# Altium PCB LightSwitch.PcbDoc
Units mil, origin at the board's own origin, x right, y up, seen from the top; angles counter-clockwise.
Board outline 2913.39 x 4409.45 mil, 2 copper layers (Top Layer, Bottom Layer); 106 components, 54 nets, 258 pads, 42 vias.
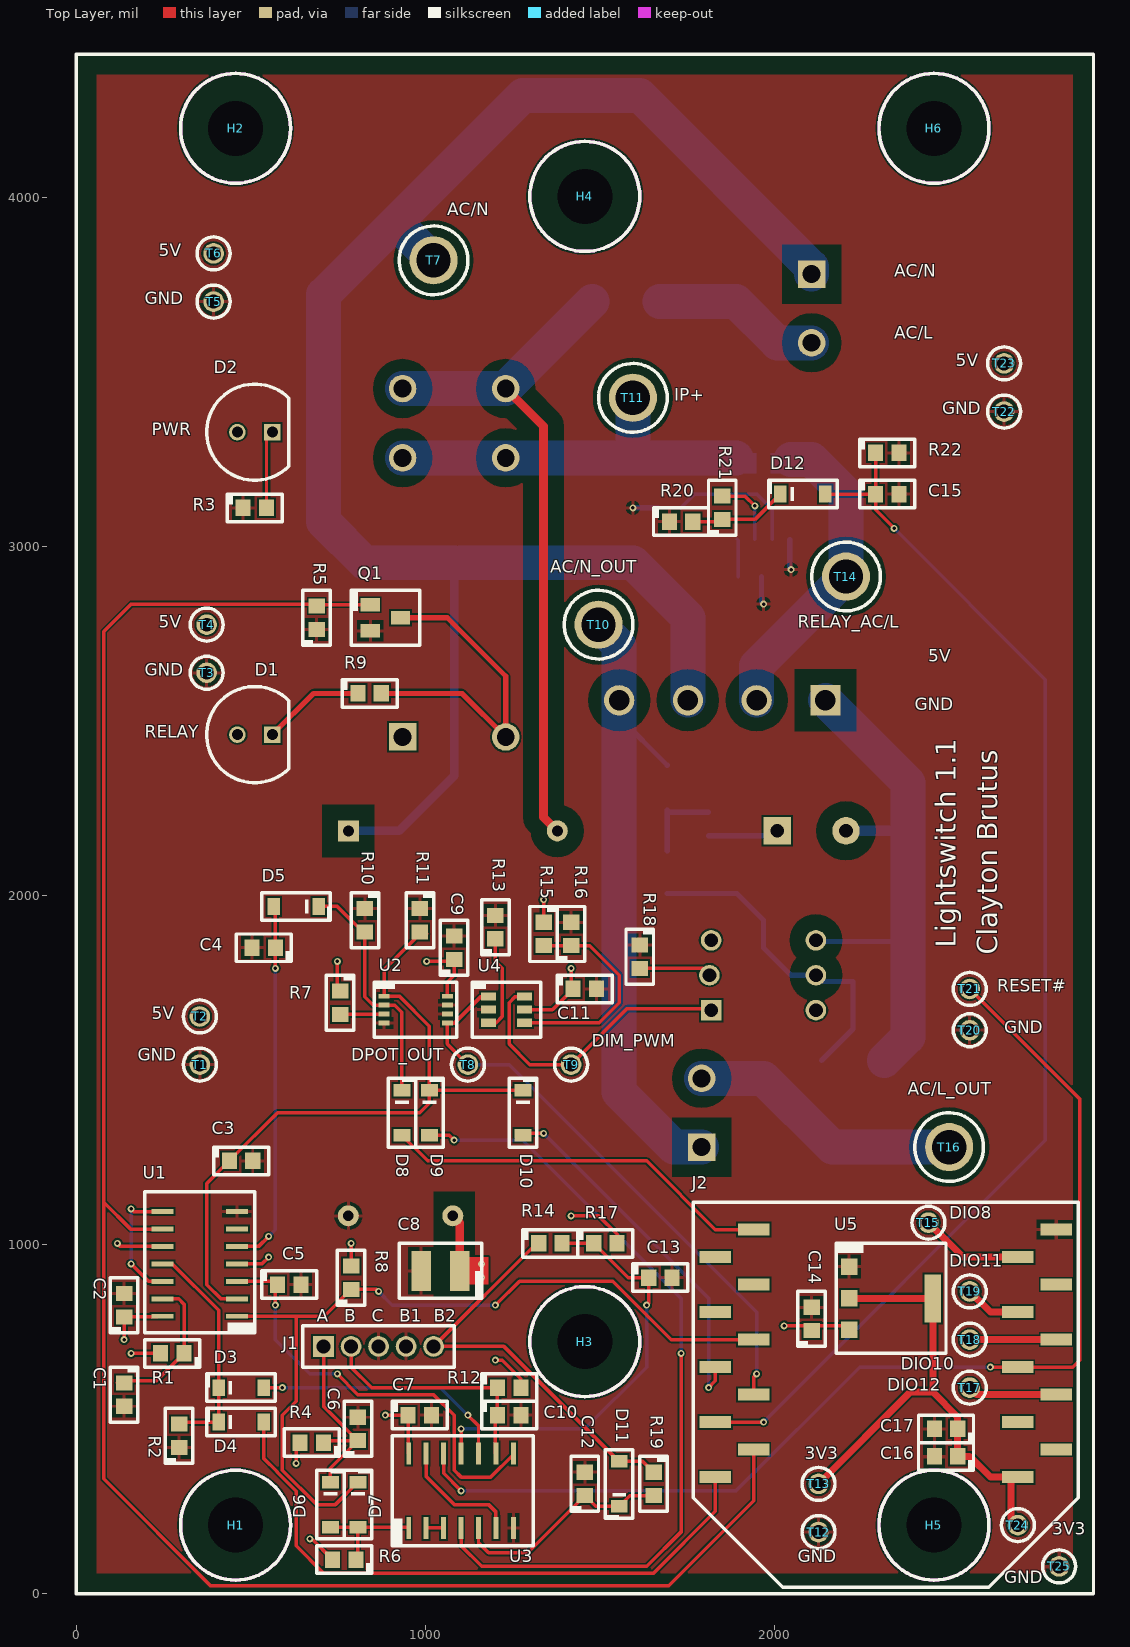
[diagram p0: Top Layer view]
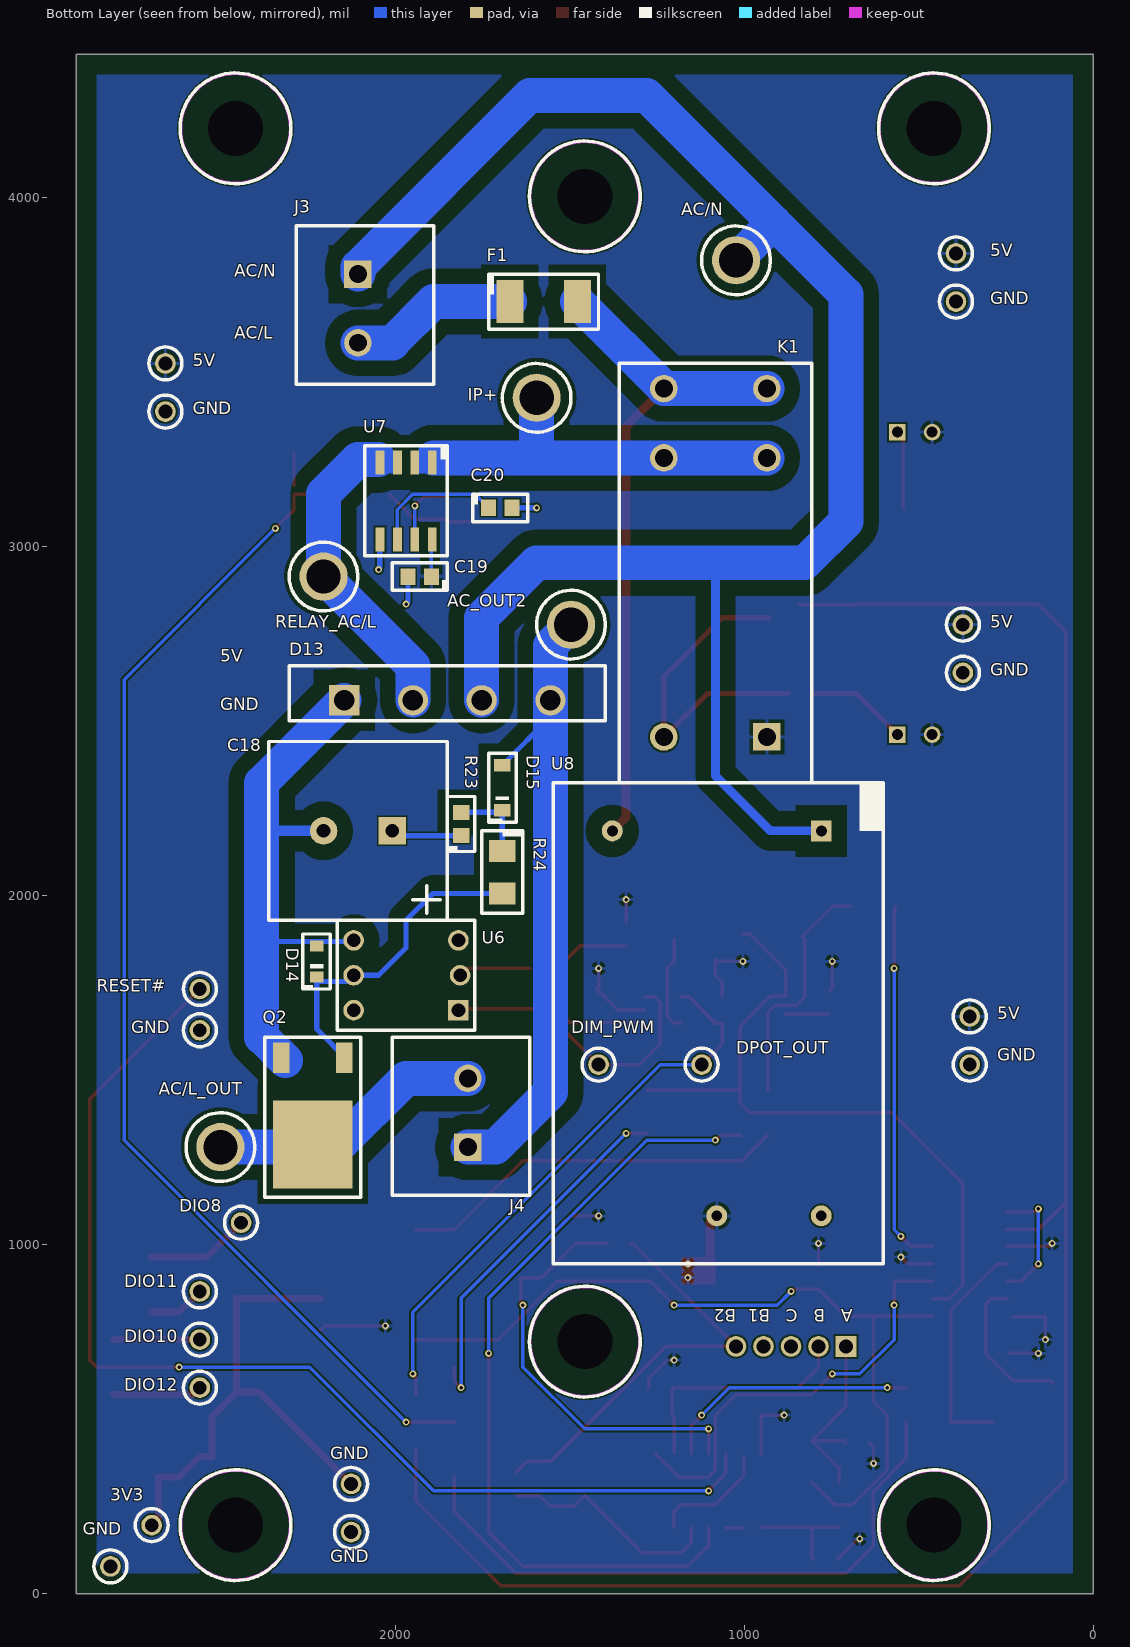
[diagram p1: Bottom Layer view, seen from below]

## Layer stack, top to bottom
Top Solder: solder mask 0.4, Solder Resist, Dk 3.5
Top Layer: signal copper 1.4
Dielectric 1: dielectric 12.6, FR-4, Dk 4.8
Bottom Layer: signal copper 1.4
Bottom Solder: solder mask 0.4, Solder Resist, Dk 3.5

## Board outline
2913.39,0 2913.39,4409.45 0,4409.45 0,0

## Design rules (kind name [scope] priority, off if disabled: settings)
Clearance "Schematic Clearance Constraint_3" [InNet('NetK1_3')] p1: gap=45 ignorepadtopadclearanceinfootprint=TRUE except(0: Arc-Text Arc-Hole Track-Text Track-Hole SMDPad-Text SMDPad-Hole THPad-Text THPad-Hole Via-Text Via-Hole Fill-Text Fill-Hole Poly-Text Poly-Hole Region-Text Region-Hole Text-Text Text-Hole)
Clearance "Schematic Clearance Constraint_2" [InNet('NetD14_1')] p2: gap=45 ignorepadtopadclearanceinfootprint=TRUE except(0: Arc-Text Arc-Hole Track-Text Track-Hole SMDPad-Text SMDPad-Hole THPad-Text THPad-Hole Via-Text Via-Hole Fill-Text Fill-Hole Poly-Text Poly-Hole Region-Text Region-Hole Text-Text Text-Hole)
Clearance "Schematic Clearance Constraint_1" [InNet('NetD15_1')] p3: gap=45 ignorepadtopadclearanceinfootprint=TRUE except(0: Arc-Text Arc-Hole Track-Text Track-Hole SMDPad-Text SMDPad-Hole THPad-Text THPad-Hole Via-Text Via-Hole Fill-Text Fill-Hole Poly-Text Poly-Hole Region-Text Region-Hole Text-Text Text-Hole)
Clearance "Schematic Clearance Constraint_14" [InNet('NetD13_4')] p4: gap=45 ignorepadtopadclearanceinfootprint=TRUE except(0: Arc-Text Arc-Hole Track-Text Track-Hole SMDPad-Text SMDPad-Hole THPad-Text THPad-Hole Via-Text Via-Hole Fill-Text Fill-Hole Poly-Text Poly-Hole Region-Text Region-Hole Text-Text Text-Hole)
Clearance "Schematic Clearance Constraint_13" [InNet('NetJ4_2')] p5: gap=45 ignorepadtopadclearanceinfootprint=TRUE except(0: Arc-Text Arc-Hole Track-Text Track-Hole SMDPad-Text SMDPad-Hole THPad-Text THPad-Hole Via-Text Via-Hole Fill-Text Fill-Hole Poly-Text Poly-Hole Region-Text Region-Hole Text-Text Text-Hole)
Clearance "Schematic Clearance Constraint_12" [InNet('AC/L')] p6: gap=45 ignorepadtopadclearanceinfootprint=TRUE except(0: Arc-Text Arc-Hole Track-Text Track-Hole SMDPad-Text SMDPad-Hole THPad-Text THPad-Hole Via-Text Via-Hole Fill-Text Fill-Hole Poly-Text Poly-Hole Region-Text Region-Hole Text-Text Text-Hole)
Clearance "Schematic Clearance Constraint_11" [InNet('AC/N')] p7: gap=45 ignorepadtopadclearanceinfootprint=TRUE except(0: Arc-Text Arc-Hole Track-Text Track-Hole SMDPad-Text SMDPad-Hole THPad-Text THPad-Hole Via-Text Via-Hole Fill-Text Fill-Hole Poly-Text Poly-Hole Region-Text Region-Hole Text-Text Text-Hole)
Clearance "Schematic Clearance Constraint_9" [InNet('NetC18_2')] p8: gap=45 ignorepadtopadclearanceinfootprint=TRUE except(0: Arc-Text Arc-Hole Track-Text Track-Hole SMDPad-Text SMDPad-Hole THPad-Text THPad-Hole Via-Text Via-Hole Fill-Text Fill-Hole Poly-Text Poly-Hole Region-Text Region-Hole Text-Text Text-Hole)
Clearance "Schematic Clearance Constraint_8" [InNet('NetD13_2')] p9: gap=45 ignorepadtopadclearanceinfootprint=TRUE except(0: Arc-Text Arc-Hole Track-Text Track-Hole SMDPad-Text SMDPad-Hole THPad-Text THPad-Hole Via-Text Via-Hole Fill-Text Fill-Hole Poly-Text Poly-Hole Region-Text Region-Hole Text-Text Text-Hole)
Clearance "Schematic Clearance Constraint" [InNet('NetF1_1')] p10: gap=45 ignorepadtopadclearanceinfootprint=TRUE except(0: Arc-Text Arc-Hole Track-Text Track-Hole SMDPad-Text SMDPad-Hole THPad-Text THPad-Hole Via-Text Via-Hole Fill-Text Fill-Hole Poly-Text Poly-Hole Region-Text Region-Hole Text-Text Text-Hole)
Clearance [All] p11: gap=5 ignorepadtopadclearanceinfootprint=FALSE
HoleSize [All] p1: absolutevalues=TRUE maxlimit=157.48 minlimit=0.98 maxpercent=80.000 minpercent=20.000
PolygonConnect [All] p1: connectstyle=Relief reliefconductorwidth=10 reliefentries=4 polygonreliefangle="90 Angle" airgapwidth=10
RoutingVias [All] p1: holewidth=28 width=50 viastyle="Through Hole" minholewidth=28 minwidth=50 maxholewidth=28 maxwidth=50
SolderMaskExpansion [All] p1: expansion=4
Width "Schematic Width Constraint_1" [InNet('NetK1_3')] p1: maxlimit=250 minlimit=15 preferedwidth=100 minimp=50.000000 maximp=50.000000 favimp=50.000000
Width "Schematic Width Constraint_17" [InNet('AC/L')] p2: maxlimit=250 minlimit=15 preferedwidth=100 minimp=50.000000 maximp=50.000000 favimp=50.000000
Width "Schematic Width Constraint_14" [InNet('AC/N')] p3: maxlimit=250 minlimit=15 preferedwidth=100 minimp=50.000000 maximp=50.000000 favimp=50.000000
Width "Schematic Width Constraint_13" [InNet('NetD15_1')] p4: maxlimit=250 minlimit=15 preferedwidth=100 minimp=50.000000 maximp=50.000000 favimp=50.000000
Width "Schematic Width Constraint_11" [InNet('NetC18_2')] p5: maxlimit=250 minlimit=15 preferedwidth=100 minimp=50.000000 maximp=50.000000 favimp=50.000000
Width "Schematic Width Constraint_10" [InNet('NetD13_4')] p6: maxlimit=250 minlimit=15 preferedwidth=100 minimp=50.000000 maximp=50.000000 favimp=50.000000
Width "Schematic Width Constraint_9" [InNet('NetJ4_2')] p7: maxlimit=250 minlimit=15 preferedwidth=100 minimp=50.000000 maximp=50.000000 favimp=50.000000
Width "Schematic Width Constraint_6" [InNet('NetF1_1')] p8: maxlimit=250 minlimit=15 preferedwidth=100 minimp=50.000000 maximp=50.000000 favimp=50.000000
Width "Schematic Width Constraint" [InNet('NetD14_1')] p9: maxlimit=250 minlimit=15 preferedwidth=100 minimp=50.000000 maximp=50.000000 favimp=50.000000
Width "Schematic Width Constraint_8" [InNet('NetD13_2')] p10: maxlimit=250 minlimit=15 preferedwidth=100 minimp=50.000000 maximp=50.000000 favimp=50.000000
Width [All] p11: maxlimit=98425.2 minlimit=10 preferedwidth=10
29 further rules are at their usual default settings.

## Classes and differential pairs
component class Logic: C1 C2 C3 C4 C5 C6 C7 C10 C13 D3 D4 D5 D6 D7 D8 D9 D10 J1 R1 R2 R4 R6 R8 R10 R11 R12 R14 R17 U1 U3
component class XBee: C12 C17 D11 J2 R19 T15 T17 T18 T19 T20 T21
component class Power: C8 C14 C16 D2 F1 H1 H2 H3 H4 H5 H6 J3 R3 T1 T2 T3 T4 T5 T6 T12 T13 T22 T23 T24 T25 U5 U8
component class Dimmer: C9 C11 C15 C18 C19 C20 D1 D12 D13 D14 D15 J4 K1 Q1 Q2 R5 R7 R9 R13 R15 R16 R18 R20 R21 R22 R23 R24 T7 T8 T9 T10 T11 T14 T16 U2 U4 U6 U7

## Components (designator, comment, footprint, x,y, rotation, side; value= is the part's Value field where it differs from the comment)
C1 "C_CAP_0603" 0603 137.8,570.87 r0 top value=10uF
C2 "C_CAP_0603" 0603 137.8,826.77 r180 top value=.1uF
C3 "C_CAP_0603" 0603 472.44,1240.16 r90 top value=.1uF
C4 "C_CAP_0603" 0603 537.4,1850.39 r270 top value=.1uF
C5 "C_CAP_0603" 0603 610.24,885.83 r90 top value=.1uF
C6 "C_CAP_0603" 0603 807.09,472.44 r180 top value=.1uF
C7 "C_CAP_0603" 0603 984.25,511.81 r90 top value=.1uF
C8 "C_CAP_1210" 1210 1043.31,925.2 r270 top value=100uF
C9 "C_CAP_0603" 0603 1082.68,1850.39 r180 top value=.1uF
C10 "C_CAP_0603" 0603 1240.16,511.81 r90 top value=.1uF
C11 "C_CAP_0603" 0603 1456.69,1732.28 r90 top value=.1uF
C12 "C_CAP_0603" 0603 1456.69,314.96 r180 top value=10uF
C13 "C_CAP_0603" 0603 1673.23,905.51 r90 top value=10uF
C14 "C_CAP_0603" 0603 2106.3,787.4 r180 top value=.1uF
C15 "C_CAP_0603" 0603 2322.83,3149.61 r90 top value=10uF
C16 "C_CAP_0603" 0603 2491.14,393.7 r270 top value=10uF
C17 "C_CAP_0603" 0603 2491.14,472.44 r270 top value=.1uF
C18 "CAP" CAP12.5X20 2106.3,2185.04 r0 bottom value=47uF
C19 "C_CAP_0603" 0603 1929.13,2913.39 r270 bottom value=.1uF
C20 "C_CAP_0603" 0603 1698.82,3110.24 r90 bottom value=1nF
D1 "D_LED_LED5MM" LED5MM 511.81,2460.63 r180 top
D2 "D_LED_LED5MM" LED5MM 511.81,3326.77 r180 top
D3 "D_DIODE_SOD123" SOD123 472.44,590.55 r90 top
D4 "D_DIODE_SOD123" SOD123 472.44,492.13 r90 top
D5 "D_DIODE_SOD123" SOD123 629.92,1968.5 r270 top
D6 "D_DIODE_SOD123" SOD123 728.35,255.91 r0 top
D7 "D_DIODE_SOD123" SOD123 807.09,255.91 r0 top
D8 "D_DIODE_SOD123" SOD123 933.07,1377.95 r0 top
D9 "D_DIODE_SOD123" SOD123 1011.81,1377.95 r0 top
D10 "D_DIODE_SOD123" SOD123 1279.53,1377.95 r0 top
D11 "D_DIODE_SOD123" SOD123 1555.12,314.96 r180 top
D12 "D_ZENER_SOD123" SOD123 2081.3,3149.61 r90 top value=2V
D13 "D_RECTBRIDGE_GBU1506TB" GBU 1850.39,2559.06 r0 bottom
D14 "D_ZENER_SOD323" SOD323 2224.41,1811.02 r0 bottom value=10V
D15 "D_DIODE_SOD123" SOD123 1692.91,2308.47 r0 bottom
F1 "F_FUSE_2410" 2410 1574.8,3700.79 r90 bottom value=15A
H1 "H_MOUNTHOLE_MOUNTHOLE4MM" MOUNTHOLE4MM 456.69,196.85 r0 top locked value=4mm
H2 "H_MOUNTHOLE_MOUNTHOLE4MM" MOUNTHOLE4MM 456.69,4196.85 r0 top locked value=4mm
H3 "H_MOUNTHOLE_MOUNTHOLE4MM" MOUNTHOLE4MM 1456.69,722.44 r0 top locked value=4mm
H4 "H_MOUNTHOLE_MOUNTHOLE4MM" MOUNTHOLE4MM 1456.69,4001.97 r0 top locked value=4mm
H5 "H_MOUNTHOLE_MOUNTHOLE4MM" MOUNTHOLE4MM 2456.69,196.85 r0 top locked value=4mm
H6 "H_MOUNTHOLE_MOUNTHOLE4MM" MOUNTHOLE4MM 2456.69,4196.85 r0 top locked value=4mm
J1 "J_RIBBCONN_RIBBCONN" RIBBCONN 866.14,708.66 r0 top
J2 "J_XBEE_NPPN101BFLC-RC" NPPN101BFLC-RC 2318.7,688.98 r180 top
J3 "J_2POSTERM_1935161" 1935161 2106.3,3681.1 r270 bottom
J4 "J_2POSTERM_1935161" 1935161 1791.34,1377.95 r90 bottom
K1 "K_RELAY-RZ03-1A4_RZ03-1A4-D005" RZ03-1A4-D005 1082.68,2952.76 r270 bottom
Q1 "Q_NFET_SOT23" SOT23 885.83,2795.28 r270 top
Q2 "Q_NFET_TO252" TO252 2235.43,1411.42 r0 bottom
R1 "R_RES_0603" 0603 275.59,688.98 r270 top value=470K
R2 "R_RES_0603" 0603 295.28,452.76 r180 top value=10K
R3 "R_RES_0603" 0603 511.81,3110.24 r90 top value=180
R4 "R_RES_0603" 0603 675.2,433.07 r270 top value=10K
R5 "R_RES_0603" 0603 688.98,2795.28 r180 top value=10K
R6 "R_RES_0603" 0603 767.72,98.43 r270 top value=10K
R7 "R_RES_0603" 0603 755.91,1692.91 r0 top value=806K
R8 "R_RES_0603" 0603 787.4,905.51 r180 top value=10K
R9 "R_RES_0603" 0603 840.55,2578.74 r90 top value=180
R10 "R_RES_0603" 0603 826.77,1929.13 r0 top value=10K
R11 "R_RES_0603" 0603 984.25,1929.13 r0 top value=10K
R12 "R_RES_0603" 0603 1240.16,590.55 r90 top value=10K
R13 "R_RES_0603" 0603 1200.79,1909.45 r180 top value=196K
R14 "R_RES_0603" 0603 1358.27,1003.94 r90 top value=1.62K
R15 "R_RES_0603" 0603 1338.58,1889.76 r0 top value=1M
R16 "R_RES_0603" 0603 1417.32,1889.76 r180 top value=280K
R17 "R_RES_0603" 0603 1515.75,1003.94 r90 top value=10K
R18 "R_RES_0603" 0603 1614.17,1824.8 r0 top value=180
R19 "R_RES_0603" 0603 1653.54,314.96 r0 top value=806K
R20 "R_RES_0603" 0603 1732.28,3070.87 r90 top value=10K
R21 "R_RES_0603" 0603 1850.39,3110.24 r180 top value=2.49K
R22 "R_RES_0603" 0603 2322.83,3267.72 r90 top value=196K
R23 "R_RES_0603" 0603 1811.02,2204.72 r0 bottom value=1.62K
R24 "R_RES_1206" 1206 1692.91,2066.93 r180 bottom value=100K
T1 "TESTPOINT" TESTPOINT1MM 354.33,1515.75 r0 top value=1mm (schematic designator T20)
T2 "TESTPOINT" TESTPOINT1MM 354.33,1653.54 r0 top value=1mm
T3 "TESTPOINT" TESTPOINT1MM 374.02,2637.8 r180 top value=1mm
T4 "TESTPOINT" TESTPOINT1MM 374.02,2775.59 r180 top value=1mm
T5 "TESTPOINT" TESTPOINT1MM 393.7,3700.79 r0 top value=1mm (schematic designator T23)
T6 "TESTPOINT" TESTPOINT1MM 393.7,3838.58 r0 top value=1mm (schematic designator T5)
T7 "TESTPOINT" TESTPOINT2.5MM 1023.62,3818.9 r0 top value=2.54mm
T8 "TESTPOINT" TESTPOINT1MM 1122.05,1515.75 r90 top value=1mm
T9 "TESTPOINT" TESTPOINT1MM 1417.32,1515.75 r0 top value=1mm
T10 "TESTPOINT" TESTPOINT2.5MM 1496.06,2775.59 r0 top value=2.54mm
T11 "TESTPOINT" TESTPOINT2.5MM 1594.49,3425.2 r0 top value=2.54mm (schematic designator T1)
T12 "TESTPOINT" TESTPOINT1MM 2125.98,177.17 r0 top value=1mm (schematic designator T24)
T13 "TESTPOINT" TESTPOINT1MM 2125.98,314.96 r0 top value=1mm (schematic designator T19)
T14 "TESTPOINT" TESTPOINT2.5MM 2204.72,2913.39 r0 top value=2.54mm (schematic designator T11)
T15 "TESTPOINT" TESTPOINT1MM 2440.94,1062.99 r0 top value=1mm (schematic designator T12)
T16 "TESTPOINT" TESTPOINT2.5MM 2500,1279.53 r0 top value=2.54mm (schematic designator T13)
T17 "TESTPOINT" TESTPOINT1MM 2559.06,590.55 r0 top value=1mm (schematic designator T14)
T18 "TESTPOINT" TESTPOINT1MM 2559.06,728.35 r0 top value=1mm (schematic designator T15)
T19 "TESTPOINT" TESTPOINT1MM 2559.06,866.14 r0 top value=1mm (schematic designator T16)
T20 "TESTPOINT" TESTPOINT1MM 2559.06,1614.17 r180 top value=1mm (schematic designator T17)
T21 "TESTPOINT" TESTPOINT1MM 2559.06,1732.28 r180 top value=1mm (schematic designator T18)
T22 "TESTPOINT" TESTPOINT1MM 2657.48,3385.83 r0 top value=1mm (schematic designator T25)
T23 "TESTPOINT" TESTPOINT1MM 2657.48,3523.62 r0 top value=1mm (schematic designator T6)
T24 "TESTPOINT" TESTPOINT1MM 2696.85,196.85 r180 top value=1mm (schematic designator T21)
T25 "TESTPOINT" TESTPOINT1MM 2814.96,78.74 r180 top value=1mm (schematic designator T22)
U1 "U_DUALDFLIP_SOIC14" SOIC14 354.33,944.88 r90 top
U2 "U_DS4301_MSOP8" MSOP8 972.44,1673.23 r270 top value=200K
U3 "U_SN74HCT04DR_SOIC14" SOIC14 1102.36,295.28 r0 top
U4 "U_LTC6992CS6-2_SOT23-6" SOT23-6 1232.68,1673.23 r270 top
U5 "U_LD1117S33TR_SOT223" SOT223 2333.66,846.46 r270 top value=3.3V
U6 "U_MCT275_DIP6" DIP6 1968.5,1771.65 r0 bottom
U7 "U_ACS712_SOIC8" SOIC8 1968.5,3129.92 r0 bottom
U8 "U_IRM-02-5_IRM-02-5" IRM-02-5 779.53,2185.04 r270 bottom value=5V

## Footprints (in the part's own frame and the unit in brackets; to place one, negate y for a bottom-side part, rotate by r counter-clockwise, add the part's x,y. Pads: shape width x height; smd on the part's side, far side on the other; paste and mask are expansions set on the pad)
0603 [mm]
  rect 1.2x1.1 smd: 1(0,0.85) 2(0,-0.85)
  silkscreen extent -1,-2 1,2, body extent -0.43,-0.77 0.43,0.78, height 0.44
1206 [mm]
  rect 1.9x1.6 smd: 1(0,1.55) 2(0,-1.55)
  silkscreen extent -1.5,-3 1.5,3, body extent -0.8,-1.6 0.8,1.6, height 1.5
1210 [mm]
  rect 2.9x1.4 smd: 1(0,1.4) 2(0,-1.4)
  silkscreen extent -2,-3 2,3, body extent -1.35,-1.75 1.35,1.75, height 2.7
2410 [mm]
  rect 3.15x1.96 smd: 1(0,2.455) 2(0,-2.455)
  silkscreen extent -2,-4 2,4, body extent -1.27,-3.05 1.27,3.05, height 2.58
1935161 [mm]
  rect 2x2 hole 1.3: 1(-2.5,0)
  round 2 hole 1.3: 2(2.5,0)
  silkscreen extent -6,-4.5 5.5,5.5, body extent -5.59,-4 4.98,5, height 11.4
CAP12.5X20 [mm]
  rect 2x2 hole 1: 1(-2.5,0)
  round 2 hole 1: 2(2.5,0)
  silkscreen extent -6.5,-6.5 6.5,6.5, body extent -6.24,-6.25 6.24,6.25, height 20.33
DIP6 [mm]
  rect 1.5x1.5 hole 1: 1(-3.81,2.54)
  round 1.5 hole 1: 2(-3.935,0) 3(-3.81,-2.54) 4(3.81,-2.54) 5(3.81,0) 6(3.81,2.54)
  silkscreen extent -5,-4 5,4, body extent -3.94,-3.63 3.94,3.63, height 4.4
GBU [mm]
  rect 2.2x2.2 hole 1.5: 1(7.5,0)
  round 2.2 hole 1.5: 2(2.5,0) 3(-2.5,0) 4(-7.5,0)
  silkscreen extent -11.5,-2.5 11.5,1.5, body extent -11.02,-2.22 11.03,1.21, height 21.27
IRM-02-5 [mil] "IRM-02-5"
  rect 60x60 hole 31.5: 1(0,0)
  round 60 hole 31.5: 2(0,-598.43)
  round 60 hole 30: 3(1102.36,0) 4(1102.36,-299.21)
  silkscreen extent -138,-768 1240,177, body extent -112,-736 1215,138, height 591
LED5MM [mm]
  rect 1.2x1.2 hole 0.8: 1(-1.27,0)
  round 1.2 hole 0.8: 2(1.27,0)
  silkscreen extent -2.47,-3.5 3.5,3.5, body extent -2.58,-2.95 2.87,2.95, height 13.6
MOUNTHOLE4MM [mm]
  round 0 hole 4 unplated: ""(0,0)
  Keep-Out Layer circle w0.254: c0,0 r4
  silkscreen extent -4,-4 4,4
MSOP8 [mm]
  rect 0.35x0.8 smd mask+0.051: 1(-0.975,-2.3) 2(-0.325,-2.3) 3(0.325,-2.3) 4(0.975,-2.3) 5(0.975,2.3) 6(0.325,2.3) 7(-0.325,2.3) 8(-0.975,2.3)
  silkscreen extent -2,-3 2,3, body extent -1.5,-2.45 1.5,2.45, height 1.15
NPPN101BFLC-RC [mm]
  rect 2.29x0.89 smd: 1(-9.605,9) 2(-12.395,7) 3(-9.605,5) 4(-12.395,3) 5(-9.605,1) 6(-12.395,-1) 7(-9.605,-3) 8(-12.395,-5) 9(-9.605,-7) 10(-12.395,-9) 11(9.605,-9) 12(12.395,-7) 13(9.605,-5) 14(12.395,-3) 15(9.605,-1) 16(12.395,1) 17(9.605,3) 18(12.395,5) 19(9.605,7) 20(12.395,9)
  silkscreen extent -14,-11 14,17, body extent -13,-10.25 13,10.25
RIBBCONN [mm]
  rect 1.5x1.5 hole 1: 1(-4,0)
  round 1.5 hole 1: 2(-2,0) 3(0,0) 4(2,0) 5(4,0)
  silkscreen extent -5.5,-1.5 5.5,1.5
RZ03-1A4-D005 [mm]
  rect 2x2 hole 1.3: 1(12.67,3.75)
  round 2 hole 1.3: 2(12.67,-3.75) 3(-7.63,3.75) 4(-7.63,-3.75) 5(-12.67,-3.75) 6(-12.67,3.75)
  silkscreen extent -14.5,-7 16,7, body extent -13.82,-6.35 15.18,6.35, height 15.7
SOD123 [mm]
  rect 1.22x0.91 smd: 1(0,1.635) 2(0,-1.635)
  silkscreen extent -1,-2.5 1,2.5, body extent -0.85,-1.92 0.85,1.93, height 1.35
SOD323 [mm]
  rect 1x0.8 smd: 1(0,1.115) 2(0,-1.115)
  silkscreen extent -1,-2 1,2, body extent -0.72,-1.35 0.72,1.35
SOIC8 [mm]
  rect 0.65x1.75 smd: 1(-1.905,-2.8) 2(-0.635,-2.8) 3(0.635,-2.8) 4(1.905,-2.8) 5(1.905,2.8) 6(0.635,2.8) 7(-0.635,2.8) 8(-1.905,2.8)
  silkscreen extent -3,-4 3,4, body extent -2.5,-3.1 2.5,3.1, height 1.95
SOIC14 [mm]
  rect 0.35x1.6 smd: 1(-3.81,-2.7) 2(-2.54,-2.7) 3(-1.27,-2.7) 4(0,-2.7) 5(1.27,-2.7) 6(2.54,-2.7) 7(3.81,-2.7) 8(3.81,2.7) 9(2.54,2.7) 10(1.27,2.7) 11(0,2.7) 12(-1.27,2.7) 13(-2.54,2.7) 14(-3.81,2.7)
  silkscreen extent -5,-4 5.25,4, body extent -4.32,-3.02 4.32,3.02, height 1.59
SOT23 [mm]
  rect 1x1.4 smd: 1(-0.95,-1.1) 2(0.95,-1.1) 3(0,1.1)
  silkscreen extent -2,-2.5 2,2.5, body extent -1.5,-1.2 1.5,1.2, height 1.1
SOT23-6 [mm]
  rect 0.6x1.1 smd: 1(-0.95,-1.31) 2(0,-1.31) 3(0.95,-1.31) 4(0.95,1.31) 5(0,1.31) 6(-0.95,1.31)
  silkscreen extent -2,-2.5 2,2.5, body extent -1.5,-1.42 1.5,1.42
SOT223 [mm]
  rect 1.2x1.2 smd: 1(-2.3,-3.05) 2(0,-3.05) 3(2.3,-3.05)
  rect 3.5x1.2 smd: 4(0,3.05)
  silkscreen extent -4,-4 4,4, body extent -3.25,-3.45 3.25,3.45
TESTPOINT1MM [mm]
  round 1.5 hole 1: 1(0,0)
  silkscreen extent -1.2,-1.2 1.2,1.2
TESTPOINT2.5MM [mm]
  round 3.5 hole 2.5: 1(0,0)
  silkscreen extent -2.5,-2.5 2.5,2.5
TO252 [mm]
  rect 1.2x2.2 smd: 1(-2.28,-3.15) 3(2.28,-3.15)
  rect 5.8x6.4 smd: 2(0,3.15)
  silkscreen extent -3.5,-4.65 3.5,7, body extent -3.25,-3.5 3.25,5.2, height 2.3

## Part data
C1 C12 C13 C15 C16: Manufacturer="Taiyo Yuden", PartNumber=JMK107ABJ106MA-T, Rating=6.3V
C2 C3 C4 C5 C6 C7 C9 C10 C11 C14 C17 C19: Manufacturer=KEMET, PartNumber=C0603C104K5RACAUTO, Rating=50V
C8: Manufacturer=Murata, PartNumber=GRM32ER61A107ME20L, Rating=10V
C18: library part C_CAP-P_CAP12.5X20, Manufacturer=Nichicon, PartNumber=UVR2D470MHD1TO, Rating=200V
C20: Manufacturer="AVX Corporation", PartNumber=06035C102KAT2A, Rating=50V
D3 D4 D5 D6 D7 D8 D9 D10 D11 D15: Manufacturer="Nexperia USA Inc", PartNumber=BAS16GWJ, Rating=215mA
D12: Manufacturer="Diodes Incorporated", PartNumber=BZT52C2V0-7-F, Rating=500mW
D13: Manufacturer="SMC Diode Solutions", PartNumber=GBU1506TB, Rating=15A
D14: Manufacturer="On Semiconductor", PartNumber=MM3Z10VT1G, Rating=300mW
F1: Manufacturer="Bel Fuse", PartNumber=0679H9150-05, Rating=350VAC
J2: Manufacturer="Sullins Connector Solutions", PartNumber=NPPN101BFLC-RC, Rating=1A
J3 J4: Manufacturer="Phoenix Contact", PartNumber=1935161, Rating=17.5A
K1: Manufacturer="TE Connectivity / Potter and Brumfield", PartNumber=RZ03-1A4-D005, Rating=16A
Q1: Manufacturer="On Semiconductor", PartNumber=BSS138, Rating=220mA
Q2: Manufacturer="Infineon Technologies", PartNumber=IPD50R280CEAUMA1, Rating=18.1A
R1: Manufacturer=Yageo, PartNumber=RC0603JR-07470KL, Rating=1/10W
R2 R4 R5 R6 R8 R10 R11 R12 R17 R20: Manufacturer=Yageo, PartNumber=RC0603JR-0710KL, Rating=1/10W
R3 R9 R18: Manufacturer=Yageo, PartNumber=RC0603JR-07180RL, Rating=1/10W
R7 R19: Manufacturer=Yageo, PartNumber=RC0603FR-07806KL, Rating=1/10W
R13 R22: Manufacturer=Yageo, PartNumber=RC0603FR-07196KL, Rating=1/10W
R14 R23: Manufacturer=Yageo, PartNumber=RC0603FR-071K62L, Rating=1/10W
R15: Manufacturer=Yageo, PartNumber=RC0603FR-071ML, Rating=1/10W
R16: Manufacturer=Yageo, PartNumber=RC0603FR-07280KL, Rating=1/10W
R21: Manufacturer=Yageo, PartNumber=RC0603FR-072K49L, Rating=1/10W
R24: Manufacturer=Yageo, PartNumber=RC1206JR-07100KL, Rating=1/4W
T1 T2 T3 T4 T5 T6 T8 T9 T12 T13 T15 T17 T18 T19 T20 T21 T22 T23 T24 T25: library part T_TESTPOINT_TESTPOINT1MM
T7 T10 T11 T14 T16: library part T_TESTPOINT_TESTPOINT2.5MM
U1: Manufacturer=TI, PartNumber=SN74HCT74DR
U2: Manufacturer=Maxim, PartNumber=DS4301
U3: Manufacturer=TI, PartNumber=SN74HCT04DR
U4: Manufacturer=Linear, PartNumber=LTC6992CS6-2
U5: Manufacturer=STM, PartNumber=LD1117S33TR, Rating=800mA
U6: Manufacturer=Vishay, PartNumber=MCT275
U7: Manufacturer="Allegro MicroSystems, LLC", PartNumber=ACS712ELCTR-20A-T, Rating=20A
U8: PartNumber=IRM-02-5, Rating=400mA

## Via types
v1: diameter 20, hole 10, Top Layer to Bottom Layer, 32 vias
v2: diameter 20, hole 10, Top Layer to Bottom Layer, tented both sides, 10 vias

## Nets (pads, with @x,y where several pads share a name; then routed paths per layer and width w, separated by ;. In a path a pad name is that pad's centre, name@x,y a point inside that pad or via, vN(x,y) a via of type N, cw(c..) or ccw(c..) an arc to the next point about the centre after c; other vN are vias at no path point)
3V3: C16.1 C17.1 J2.1 T13.1 T24.1 U5.2 U5.4 | length 1504.2
  Top Layer w20: T13.1 2388.78,577.76 2453.74,577.76 ; 2263.78,846.46 U5.2 U5.4 2453.74,577.76 ; T24.1@2677.17,216.54 2677.17,334.65 2618.11,334.65 2559.05,393.7 C16.1 C17.1 2524.61,506.89 2453.74,577.76
5V: C2.1 C7.1 C8.1 C9.1 C11.1 C14.1 C19.1 D1.2 D2.2 K1.1 R1.2 R4.2 R6.2 R7.1 R8.2 R12.2 R15.1 R17.2 T2.1 T4.1 T6.1 T23.1 U1.4 U1.10 U1.14 U2.8 U3.14 U4.5 U5.3 U7.8 U8.4 | length 2204.8
  Top Layer w10: v1(118.11,1003.94) 127.17,994.88 U1.10 ; v1(137.8,728.35) C2.1 U1.14@230.31,793.31 ; v1(157.48,688.98) R1.2 ; U1.4 531.5,944.88 v1(551.18,964.57) ; v1(629.92,374.02) 629.92,421.26 R4.2 ; v1(669.29,157.48) 675.2,157.48 R6.2 ; v2(748.03,1811.02) 748.03,1734.25 R7.1 ; R8.2 v1(787.4,1003.94) ; v1(885.83,511.81) C7.1 950.79,403.15 U3.14 ; v2(1003.94,1811.02) 1076.77,1811.02 C9.1 1082.68,1771.65 1062.99,1751.97 U2.8 ; v1(1200.79,669.29) 1220.47,669.29 1273.62,616.14 R12.2 ; U4.5 1364.17,1673.23 C11.1 1417.32,1738.19 v2(1417.32,1791.34) ; R15.1 v2(1338.58,1988.19) ; v1(1417.32,1082.68) 1496.06,1082.68 1549.21,1029.53 R17.2 ; v2(2027.56,767.72) 2201.77,767.72 U5.3
  Top Layer w25: U8.4 1098.43,1062.99 C8.1
  Bottom Layer w10: U7.8 1895.67,3017.52 C19.1
  other v2: 1161.42,905.51 1161.42,944.88
AC/L: F1.2 K1.5 K1.6 U8.2 | length 1974.8
  Top Layer w25: K1.5 1338.58,3343.31 1338.58,2224.41 U8.2
  Bottom Layer w100: K1.6 K1.5 1230.31,3452.95 F1.2
AC/N: D13.3 J3.1 T7.1 U8.1 | length 5040.8
  Top Layer w25: D13.3@1732.28,2578.74 D13.3
  Bottom Layer w25: U8.1 925.2,2185.04 1082.68,2342.52 1082.68,2952.76
  Bottom Layer w100: T7.1 915.35,3927.17 ; 1082.68,2952.76 826.77,2952.76 708.66,3070.87 708.66,3720.47 915.35,3927.17 ; 1102.36,2952.76 1594.49,2952.76 1751.97,2795.27 D13.3 ; J3.1 2106.3,3799.21 1614.17,4291.34 1279.53,4291.34 915.35,3927.17
BUT_RELAY_CTRL: D3.2 U3.10 | length 740.6
  Top Layer w10: D3.2 v1(590.55,590.55) ; v1(1122.05,511.81) 1152.36,481.5 U3.10
  Bottom Layer w10: v1(590.55,590.55) 1043.31,590.55 v1(1122.05,511.81)
CURRENT_SENSE: C15.1 D12.2 J2.18 R22.1 | length 3567.2
  Top Layer w10: J2.18 v1(1968.5,492.13) ; D12.2 C15.1 2289.37,3104.33 v1(2342.52,3051.18) ; 2289.37,3175.2 R22.1
  Bottom Layer w10: v1(1968.5,492.13) 2775.59,1299.21 2775.59,2618.11 v1(2342.52,3051.18)
DIM_PWM: T9.1 U4.6 U6.1 | length 840.8
  Top Layer w10: U4.6 1257.87,1710.63 1240.16,1692.91 1240.16,1574.8 1299.21,1515.75 T9.1 1577.95,1676.38 1813.78,1676.38 U6.1
DPOT_INC#: C3.1 D9.1 D10.1 R11.2 U1.2 U2.1 | length 2020
  Top Layer w10: U1.2 414.96,844.88 374.02,885.83 374.02,1175.2 C3.1 576.77,1377.95 984.25,1377.95 1011.81,1405.51 D9.1 ; R11.2@1003.94,1889.76 984.25,1889.76 881.89,1787.4 U2.1 926.18,1711.61 1011.81,1625.99 D9.1 ; D10.1 D9.1
DPOT_OUT: J2.17 T8.1 U2.5 U4.1 | length 1653
  Top Layer w10: T8.1 1062.99,1574.8 U2.5 1083.66,1634.84 1159.45,1710.63 U4.1 ; J2.17 1940.55,621.65 v2(1948.82,629.92)
  Bottom Layer w10: T8.1 1240.16,1515.75 1948.82,807.09 v2(1948.82,629.92)
DPOT_U/D#: D5.1 D8.1 R10.2 U2.2 | length 698.2
  Top Layer w10: D5.1 748.03,1968.5 833.66,1882.87 826.77,1875.98 826.77,1710.45 851.2,1686.02 912.58,1686.02 933.07,1665.54 D8.1
ENC_A: C6.1 D6.1 J1.1 R4.1 | length 562.6
  Top Layer w10: R4.1 714.57,438.98 C6.1 ; J1.1 708.66,537.4 C6.1 ; D6.1 728.35,360.24 C6.1
ENC_B: C10.1 J1.2 R12.1 U3.9 | length 692.7
  Top Layer w10: J1.2 787.4,649.61 846.46,590.55 R12.1 C10.1 1200.79,505.91 U3.9@1200.79,403.15
ENC_BUT2: D11.2 J1.5 R14.1 R19.1 | length 1202.6
  Top Layer w10: R14.1 1318.9,1003.94 J1.5 1225.37,708.66 1554.7,379.33 D11.2 1622.64,379.33 R19.1
ENC_U/D#: C4.1 D5.2 U1.5 | length 1057.7
  Top Layer w10: U1.5 522.44,994.88 v1(551.18,1023.62) ; D5.2 570.87,1963.19 C4.1 v1(570.87,1791.34)
  Bottom Layer w10: v1(551.18,1023.62) 570.87,1043.31 v1(570.87,1791.34)
GND: C1.2 C2.2 C3.2 C4.2 C5.2 C6.2 C7.2 C8.2 C9.2 C10.2 C11.2 C12.2 C13.2 C14.2 C15.2 C16.2 C17.2 C19.2 C20.2 J1.3 J1.4 J2.10 Q1.2 R2.1 R3.1 R5.1 R10.1 R11.1 R13.2 R16.2 R18.1 R20.1 R22.2 T1.1 T3.1 T5.1 T12.1 T20.1 T22.1 T25.1 U1.7 U2.4 U2.6 U2.7 U3.7 U4.2 U5.1 U7.5 U8.3 | length 240.2
  Bottom Layer w15: v1(1594.49,3110.24) C20.2 ; C19.2 1962.6,2840.55 v1(1968.5,2834.65) ; U7.5 2043.5,2936.81 v1(2047.24,2933.07)
HOLD_RESET: C12.1 D11.1 R19.2 U3.5 | length 648.5
  Top Layer w10: U3.5 1152.36,146.85 1181.1,118.11 1293.31,118.11 C12.1 1487.6,250.59 D11.1 1586.02,281.5 R19.2
NetC1_1: C1.1 R1.1 U1.13 | length 433.9
  Top Layer w10: C1.1@118.11,604.33 124.02,610.24 230.31,610.24 R1.1 309.06,829.53 293.7,844.88 U1.13
NetC5_1: C5.1 U1.3 U3.8 | length 1241.2
  Top Layer w10: U1.3 567.72,894.88 570.87,891.73 v1(570.87,826.77) ; v1(748.03,629.92) 807.09,570.87 1023.62,570.87 1082.68,511.81 1082.68,481.04 1082.36,480.73 1082.36,464.16 1082.68,463.84 1082.68,354.33 1102.36,334.65 1187.96,334.65 1252.36,399.05 U3.8
  Bottom Layer w10: v1(570.87,826.77) 570.87,728.35 669.29,629.92 v1(748.03,629.92)
NetC13_1: C13.1 R14.2 R17.1 U3.11 | length 1222.9
  Top Layer w10: U3.11 v1(1102.36,472.44) ; R14.2 R17.1 1580.71,905.51 C13.1 1639.76,832.68 v1(1633.86,826.77)
  Bottom Layer w10: v1(1102.36,472.44) 1456.69,472.44 1633.86,649.61 v1(1633.86,826.77)
NetC18_1: C18.1 R23.1 | length 202.6
  Bottom Layer w15: R23.1 1994.09,2171.26 C18.1
NetC18_2: C18.2 D13.1 D14.2 Q2.3 U6.4 | length 1600.2
  Bottom Layer w15: U6.4 2122.05,1868.11 2379.92,1868.11 2381.89,1870.08
  Bottom Layer w30: C18.2 2381.89,2185.04
  Bottom Layer w100: D13.1 2381.89,2322.84 2381.89,2185.04 2381.89,1870.08 2381.89,1595.27 Q2.3@2314.17,1527.56
NetC20_1: C20.1 U7.6 | length 381.3
  Bottom Layer w10: C20.1 1771.65,3149.61 1948.82,3149.61 1993.5,3104.92 U7.6
NetD1_1: D1.1 R9.1 | length 294.2
  Top Layer w15: D1.1 679.92,2578.74 R9.1
NetD2_1: D2.1 R3.2 | length 216.5
  Top Layer w10: R3.2 D2.1@545.28,3326.77
NetD3_1: D3.1 D4.1 R2.2 U1.11 | length 653.9
  Top Layer w10: U1.11 275.59,944.88 408.07,812.4 D3.1 D4.1 R2.2@289.37,492.13
NetD6_2: D6.2 D7.2 R6.1 U3.1 | length 320.6
  Top Layer w10: D6.2 D7.2 ; R6.1 807.09,104.33 D7.2 ; U3.1 949.8,191.54 D7.2
NetD9_2: D9.2 U3.4 | length 2329.6
  Top Layer w10: D9.2 1068.31,1313.58 v1(1082.68,1299.21) ; U3.4 1102.36,137.8 1161.42,78.74 1633.86,78.74 1732.28,177.17 v1(1732.28,688.98)
  Bottom Layer w10: v1(1082.68,1299.21) 1279.53,1299.21 1732.28,846.46 v1(1732.28,688.98)
NetD12_1: D12.1 R20.2 R21.1 | length 283.8
  Top Layer w10: R20.2 1844.49,3070.87 R21.1 1944.09,3076.77 D12.1
NetD13_2: D13.2 T14.1 U7.3 U7.4 | length 894.8
  Bottom Layer w100: D13.2 1948.82,2657.48 T14.1 2204.72,3149.61 2106.3,3248.03 U7.4@2047.24,3248.03
NetD13_4: D13.4 D15.2 J4.1 T10.1 | length 1907.8
  Bottom Layer w15: D13.4 1555.12,2510.63 D15.2
  Bottom Layer w100: T10.1 1555.12,2716.54 D13.4 1555.12,1437.01 1712.6,1279.53 J4.1
NetD14_1: D14.1 Q2.1 R24.2 U6.5 | length 957.8
  Bottom Layer w15: R24.2 1891.73,2005.91 1968.5,1929.13 1968.5,1850.39 2047.24,1771.65 U6.5 ; U6.5@2106.3,1771.65 U6.5 ; Q2.1@2134.65,1527.56 2224.41,1617.32 2224.41,1753.94 2136.22,1753.94 U6.5
NetD15_1: D15.1 R23.2 R24.1 | length 228.3
  Bottom Layer w15: R24.1 D15.1 ; D15.1@1698.82,2238.19 R23.2
NetF1_1: F1.1 J3.2 | length 483.8
  Bottom Layer w100: F1.1 1889.76,3700.79 2007.87,3582.68 J3.2
NetJ2_4: J2.4 T17.1 | length 255.8
  Top Layer w20: T17.1 2578.74,570.87 J2.4
NetJ2_6: J2.6 T18.1 | length 247.6
  Top Layer w20: T18.1 J2.6
NetJ2_7: J2.7 T19.1 | length 162.3
  Top Layer w20: T19.1 2618.11,807.09 J2.7
NetJ2_9: J2.9 T15.1 | length 296.7
  Top Layer w20: T15.1 2539.37,964.57 J2.9
NetJ4_2: J4.2 Q2.2 T16.1 | length 790.2
  Bottom Layer w100: J4.2 1968.5,1476.38 2165.35,1279.53 T16.1
NetK1_2: K1.2 Q1.3 R9.2 | length 952.5
  Top Layer w15: R9.2 1105.51,2578.74 K1.2 1230.31,2627.95 1062.99,2795.28 Q1.3
NetK1_3: K1.3 K1.4 T11.1 U7.1 U7.2 | length 1126.8
  Bottom Layer w100: K1.3 K1.4 1594.49,3253.15 ; T11.1 1594.49,3253.15 ; U7.1@1889.76,3253.15 1594.49,3253.15
NetR7_2: R7.2 U2.3 | length 126.4
  Top Layer w10: R7.2 880.91,1659.45 U2.3
NetR13_1: R13.1 U4.3 | length 277.3
  Top Layer w10: U4.3 1202.76,1635.83 1220.47,1653.54 1220.47,1791.34 1200.79,1811.02 R13.1
NetR15_2: R15.2 R16.1 U4.4 | length 624.8
  Top Layer w10: U4.4 1498.03,1635.83 1555.12,1692.91 1555.12,1771.65 1470.47,1856.3 R16.1 R15.2
NetR18_2: R18.2 U6.2 | length 207.6
  Top Layer w10: R18.2 1793.9,1791.34 U6.2
NetR21_2: R21.2 U7.7 | length 200.6
  Top Layer w10: R21.2 1915.35,3143.7 v1(1943.5,3115.55)
  Bottom Layer w10: U7.7 v1(1943.5,3115.55)
NetU1_8: U1.8 U1.12 | length 362.4
  Top Layer w10: v1(157.48,944.88) 207.48,894.88 U1.12 ; v1(157.48,1102.36) 164.96,1094.88 U1.8
  Bottom Layer w10: v1(157.48,944.88) v1(157.48,1102.36)
NetU3_2: U3.2 U3.3 | length 50
  Top Layer w10: U3.2 U3.3
NetU3_6: U3.6 U3.13 | length 343.5
  Top Layer w10: U3.13@1002.05,391.82 1002.05,336.53 1082.68,255.91 1181.1,255.91 1202.36,234.65 U3.6
RELAY_CTRL: J2.19 Q1.1 R5.2 U1.9 | length 5663.6
  Top Layer w10: U1.9 155.91,1044.88 78.74,1122.05 ; Q1.1 692.91,2832.68 R5.2 683.07,2834.65 157.48,2834.65 78.74,2755.91 78.74,1122.05 ; J2.19 1940.55,267.32 1696.76,23.54 384.9,23.54 78.74,329.7 78.74,1122.05
XB_CTRL#: D7.1 J2.15 R8.1 U1.1 | length 2369.4
  Top Layer w10: U1.1 629.92,794.88 ; D7.1 742.72,255.91 688.98,255.91 590.55,354.33 590.55,511.81 629.92,551.18 629.92,794.88 ; v1(866.14,866.14) 860.24,872.05 R8.1 710.24,794.88 629.92,794.88 ; v1(1200.79,826.77) 1269.77,895.76 1536.59,895.76 1704,728.35 J2.15
  Bottom Layer w10: v1(866.14,866.14) 905.51,826.77 v1(1200.79,826.77)
XB_INC#: D10.2 J2.16 | length 1050.3
  Top Layer w10: D10.2@1279.53,1318.9 v2(1338.58,1318.9) ; v2(1811.02,590.55) 1830.71,610.24 J2.16
  Bottom Layer w10: v2(1338.58,1318.9) 1811.02,846.46 v2(1811.02,590.55)
XB_RELAY_TOGGLE: D4.2 J2.20 | length 1798.2
  Top Layer w10: D4.2 536.81,388.39 575.55,349.65 575.55,348.12 630.01,293.66 630.01,166.37 629.92,166.28 629.92,137.8 708.66,59.06 1653.54,59.06 1830.71,236.22 J2.20
XB_RESET#: J2.5 T21.1 U3.12 | length 3247
  Top Layer w10: U3.12 1052.36,345.28 v1(1102.36,295.28) ; T21.1 2874.02,1417.32 2874.02,669.29 2854.33,649.61 J2.5 v1(2618.11,649.61)
  Bottom Layer w10: v1(1102.36,295.28) 1889.76,295.28 2244.09,649.61 v1(2618.11,649.61)
XB_U/D#: D8.2 J2.11 | length 1119.4
  Top Layer w10: D8.2 1006.49,1240.16 1633.86,1240.16 1830.71,1043.31 J2.11
pads on no net: H1. H2. H3. H4. H5. H6. J2.2 J2.3 J2.8 J2.12 J2.13 J2.14 U1.6 U6.3 U6.6

## Polygon pours and split planes (outlines as drawn)
GND on Top Layer "Top Layer-GND" (solid, remove dead copper, pour order 4): 2854.33,4350.39 59.06,4350.39 59.05,59.05 2854.33,59.06
5V on Bottom Layer "Bottom Layer-5V" (solid, remove dead copper, pour order 6): 59.05,4350.39 2854.33,4350.39 2854.33,59.05 59.05,59.05

## Other copper
Top Layer:
  rectangle net 5V: 1082.68,885.83 1181.1,964.57
  pour cut-out: 1023.62,1151.57 1141.73,1151.57 1141.73,846.46 1023.62,846.46
Bottom Layer:
  rectangle net NetD13_2: 1988.19,3208.66 2047.24,3267.72
  rectangle net NetK1_3: 1889.76,3208.66 1948.82,3267.72
  pour cut-out: 1870.08,2952.76 1870.08,3070.87 1929.13,3070.87 1929.13,2952.76
  pour cut-out: 1870.08,3070.87
  region: 440.95,1574.8

## Silkscreen, mask and mechanical layers (free items; w line width, h text height)
Top Overlay:
  the board outline again, w9.84
  text "AC/N" at 1062.99,3937.01 h60
  text "5V" at 236.22,3818.9 h60
  text "AC/N" at 2342.52,3759.84 h60
  text "GND" at 196.85,3681.1 h60
  text "AC/L" at 2342.52,3582.68 h60
  text "5V" at 2519.69,3503.94 h60
  text "IP+" at 1712.6,3405.51 h60
  text "GND" at 2480.31,3366.14 h60
  text "PWR" at 216.54,3307.09 h60
  text "AC/N_OUT" at 1358.27,2913.39 h60
  text "5V" at 236.22,2755.91 h60
  text "RELAY_AC/L" at 2066.93,2755.91 h60
  text "5V" at 2440.94,2657.48 h60
  text "GND" at 196.85,2618.11 h60
  text "GND" at 2401.57,2519.69 h60
  text "RELAY" at 196.85,2440.94 h60
  text "Lightswitch 1.1" at 2539.37,1850.39 h98.42 r90
  text "Clayton Brutus" at 2657.48,1830.71 h98.42 r90
  text "RESET#" at 2637.8,1712.6 h60
  text "5V" at 216.54,1633.86 h60
  text "GND" at 2657.48,1594.49 h60
  text "DIM_PWM" at 1476.38,1555.12 h60
  text "GND" at 177.17,1515.75 h60
  text "DPOT_OUT" at 787.4,1515.75 h60
  text "AC/L_OUT" at 2381.89,1417.32 h60
  text "DIO8" at 2500,1062.99 h60
  text "DIO11" at 2500,925.2 h60
  text "A" at 688.98,767.72 h60
  text "B" at 767.72,767.72 h60
  text "C" at 846.46,767.72 h60
  text "B1" at 925.2,767.72 h60
  text "B2" at 1023.62,767.72 h60
  text "DIO10" at 2362.2,629.92 h60
  text "DIO12" at 2322.83,570.87 h60
  text "3V3" at 2086.61,374.02 h60
  text "3V3" at 2795.28,157.48 h60
  text "GND" at 2066.93,78.74 h60
  text "GND" at 2657.48,19.68 h60
Bottom Overlay:
  text "AC/N" at 1181.1,3937.01 h60
  text "5V" at 295.28,3818.9 h60
  text "AC/N" at 2460.63,3759.84 h60
  text "GND" at 295.28,3681.1 h60
  text "AC/L" at 2460.63,3582.68 h60
  text "5V" at 2578.74,3503.94 h60
  text "IP+" at 1791.34,3405.51 h60
  text "GND" at 2578.74,3366.14 h60
  text "AC_OUT2" at 1850.39,2814.96 h60
  text "5V" at 295.28,2755.91 h60
  text "RELAY_AC/L" at 2342.52,2755.91 h60
  text "5V" at 2500,2657.48 h60
  text "GND" at 295.28,2618.11 h60
  text "GND" at 2500,2519.69 h60
  text "RESET#" at 2854.33,1712.6 h60
  text "5V" at 275.59,1633.86 h60
  text "DIM_PWM" at 1496.06,1594.49 h60
  text "GND" at 2755.91,1594.49 h60
  text "DPOT_OUT" at 1023.62,1535.43 h60
  text "GND" at 275.59,1515.75 h60
  text "AC/L_OUT" at 2677.17,1417.32 h60
  text "DIO8" at 2618.11,1082.68 h60
  text "DIO11" at 2775.59,866.14 h60
  text "A" at 688.98,826.77 h60 r180
  text "B" at 767.72,826.77 h60 r180
  text "C" at 846.46,826.77 h60 r180
  text "B1" at 925.2,826.77 h60 r180
  text "B2" at 1023.62,826.77 h60 r180
  text "DIO10" at 2775.59,708.66 h60
  text "DIO12" at 2775.59,570.87 h60
  text "GND" at 2185.04,374.02 h60
  text "3V3" at 2814.96,255.91 h60
  text "GND" at 2893.7,157.48 h60
  text "GND" at 2185.04,78.74 h60